# Altium PCB arm_board_n.PcbDoc (part 1 of 3)
Units mm, origin at the board's own origin, x right, y up, seen from the top; angles counter-clockwise.
Board outline 101.22 x 59.56 mm, 4 copper layers (Top Layer, Int1 (GND), Int2 (PWR), Bottom Layer), stack 1.565 mm thick; 88 components, 104 nets, 470 pads, 175 vias.
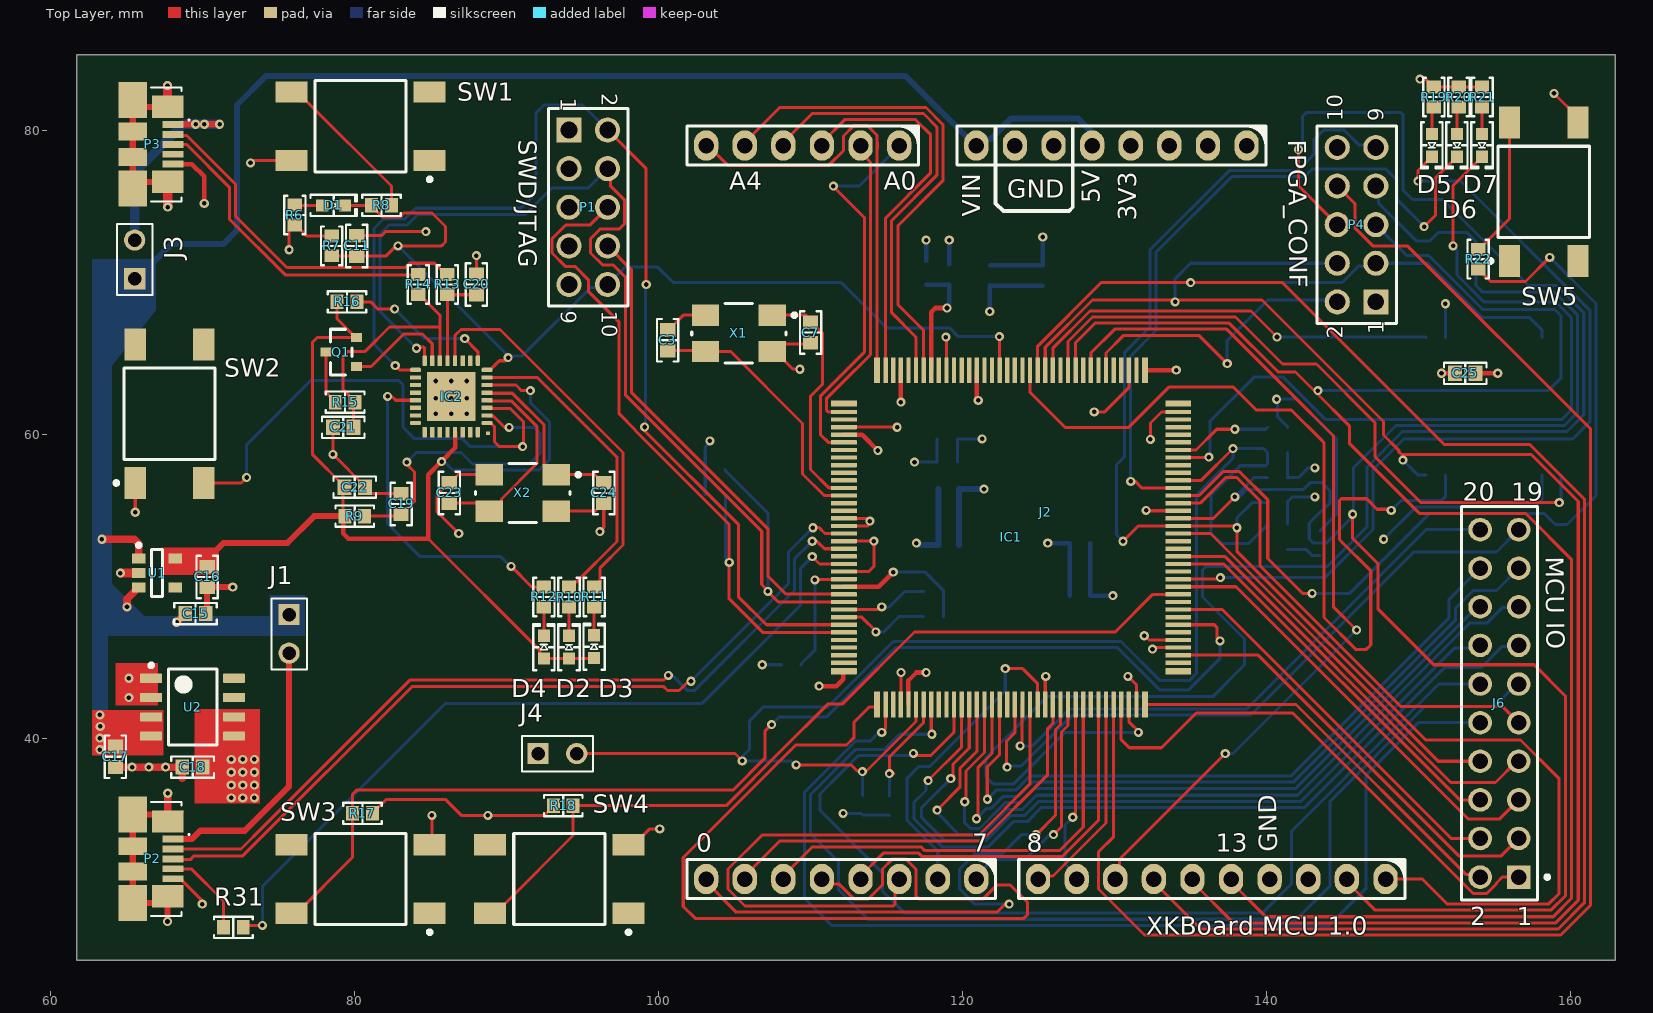
[diagram p0: Top Layer view]
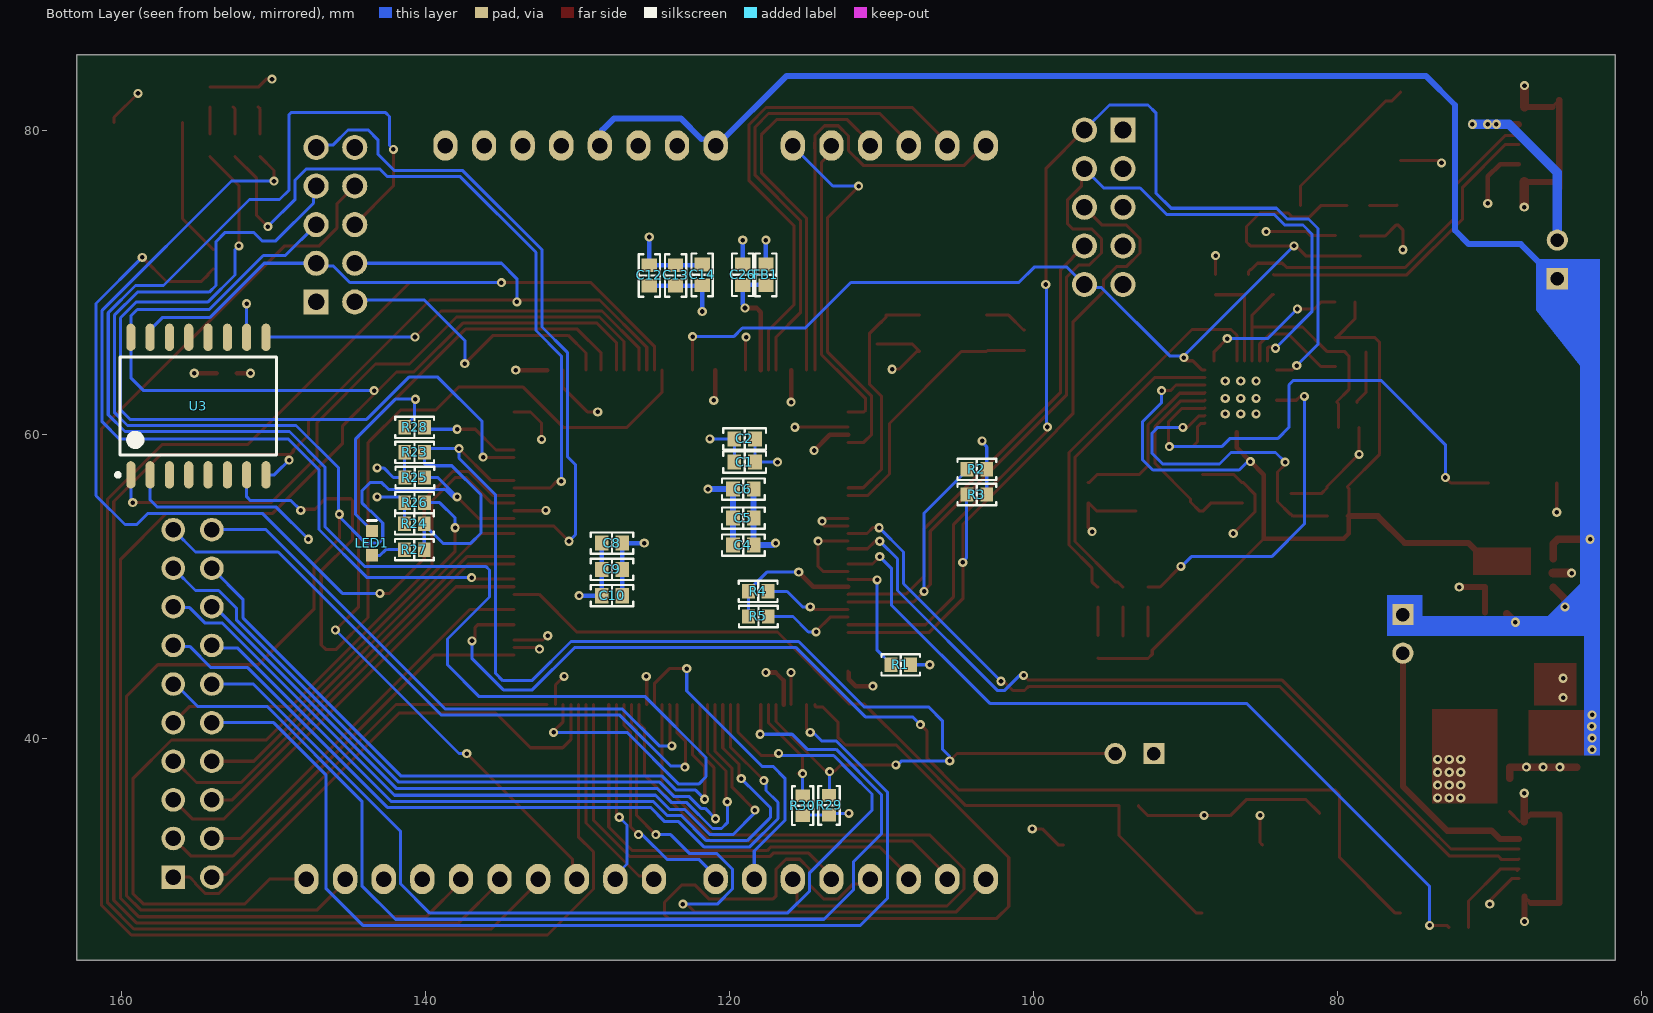
[diagram p1: Bottom Layer view, seen from below]
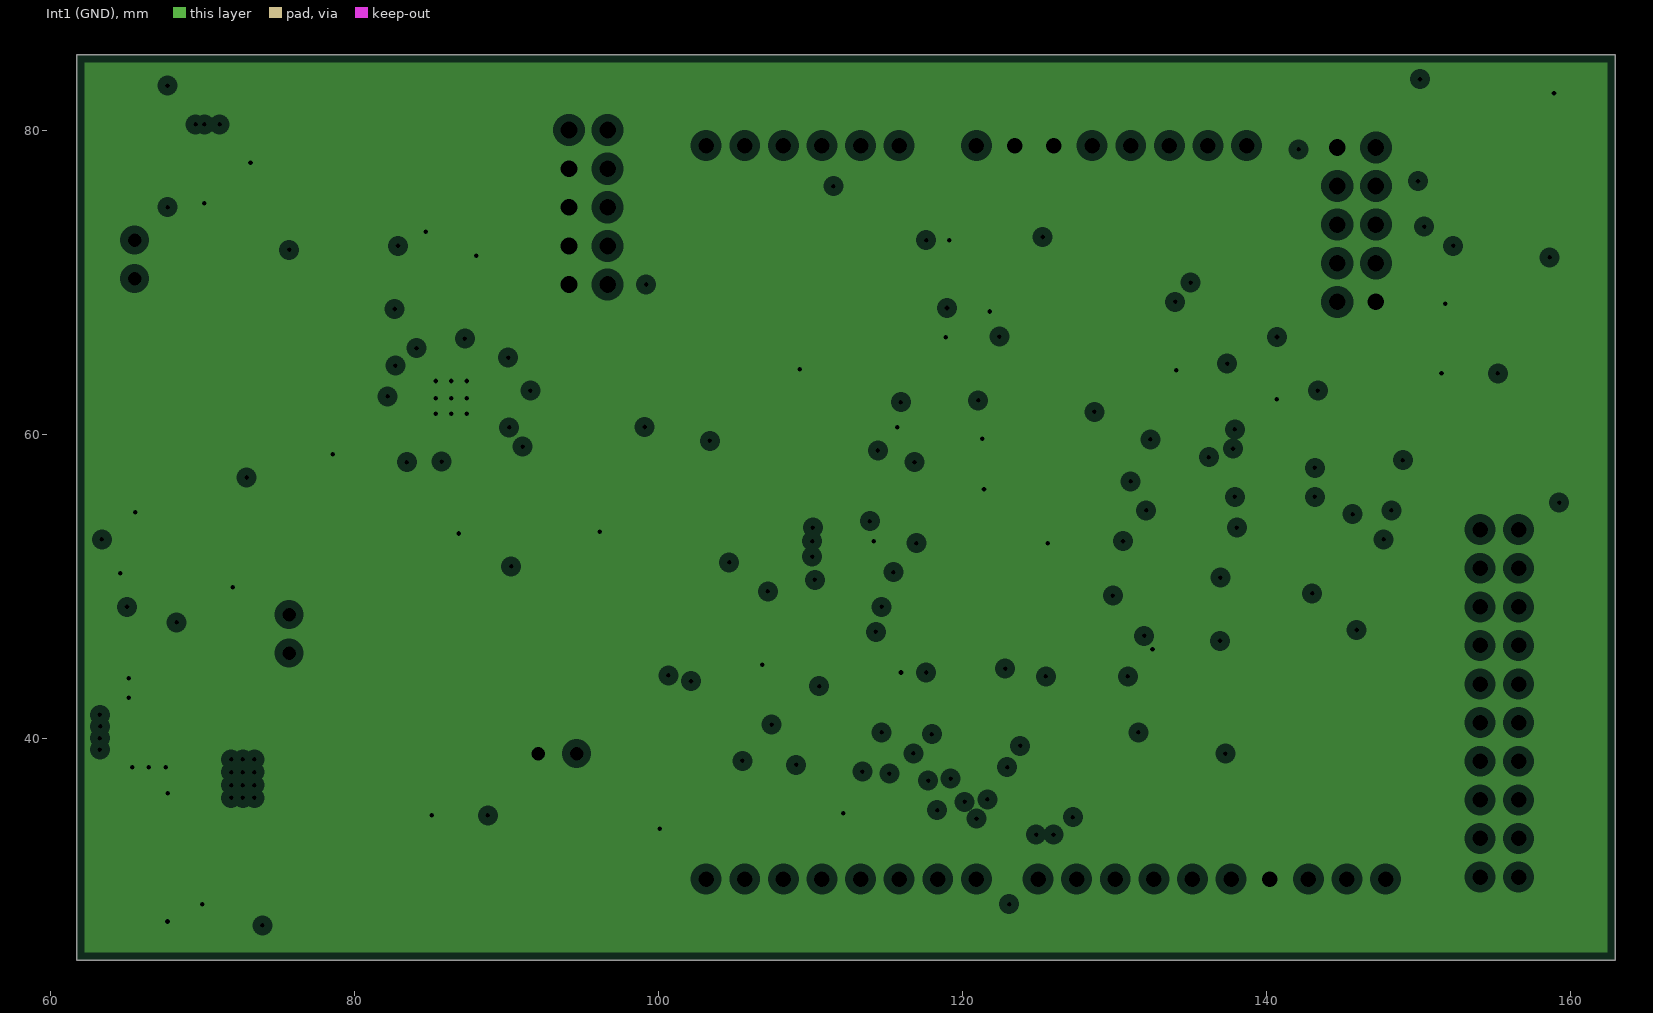
[diagram p2: Int1 (GND), clearances drawn from the general rule]
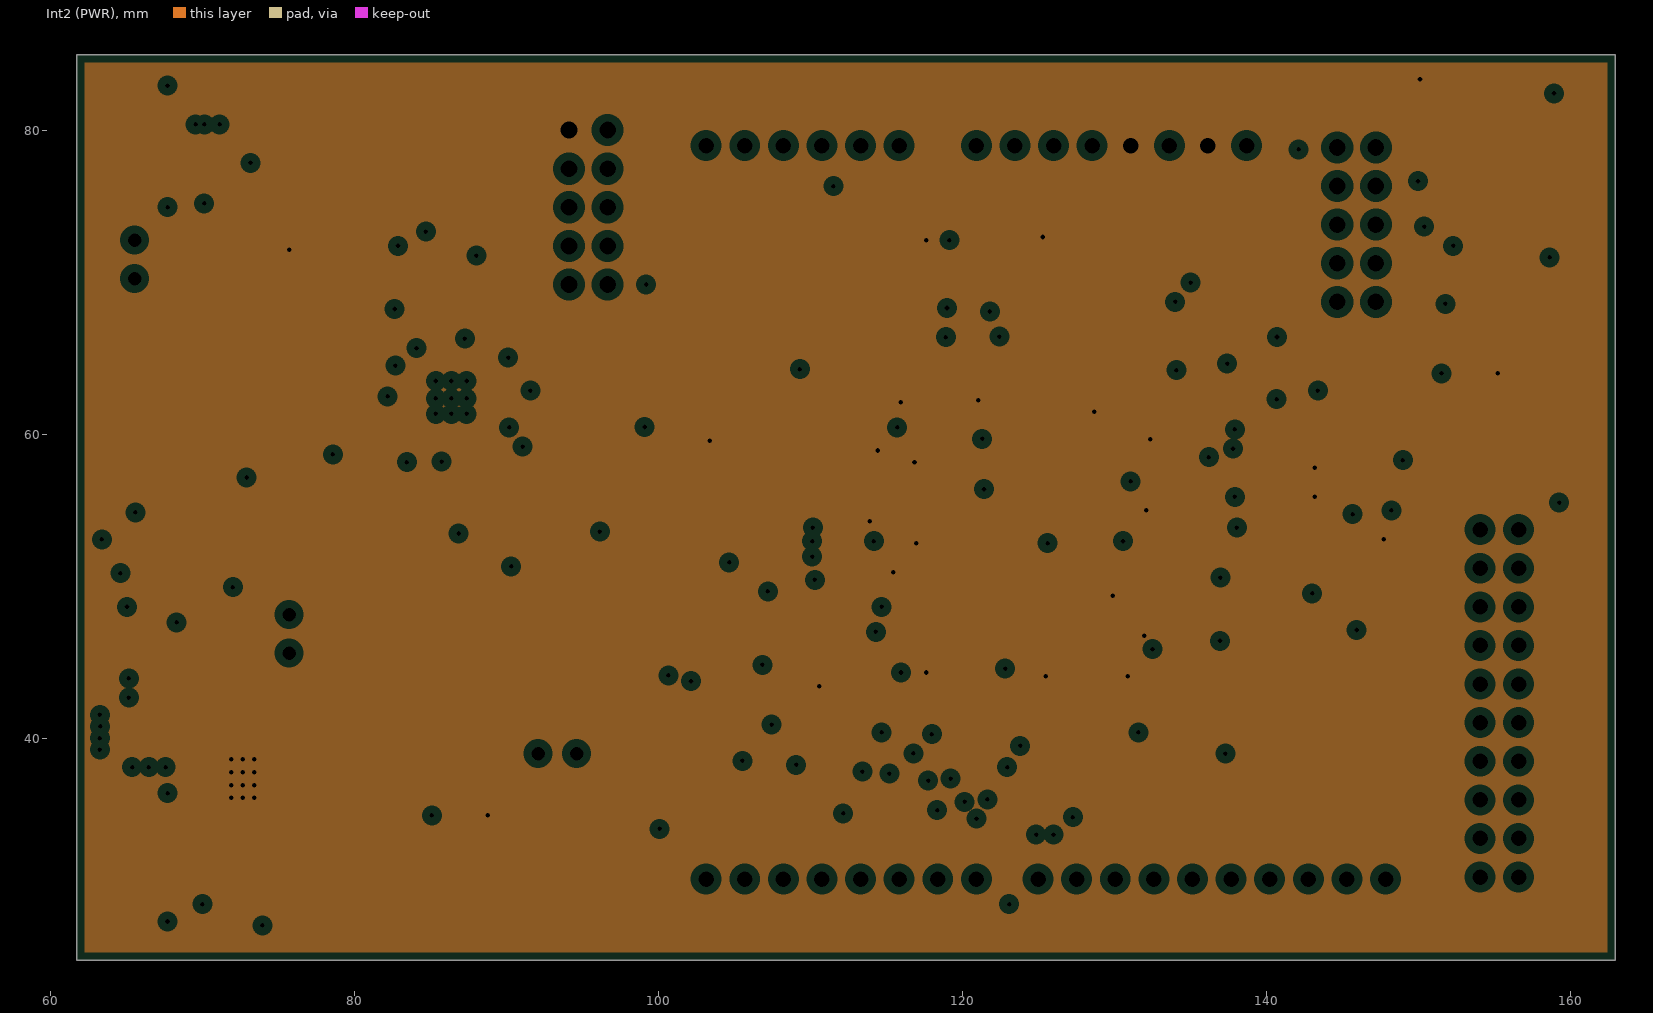
[diagram p3: Int2 (PWR), clearances drawn from the general rule]

## Layer stack, top to bottom
Top Solder: solder mask 0.0254, SM-001, Dk 4
Top Layer: signal copper 0.018
Dielectric 2: prepreg 0.1295, PP-017, Dk 4.3
Int1 (GND): plane copper 0.035, net GND
Dielectric 3: core 1.2, Core-039, Dk 4.8
Int2 (PWR): plane copper 0.035, net 3V3_MCU
Dielectric 4: prepreg 0.1295, PP-017, Dk 4.3
Bottom Layer: signal copper 0.018
Bottom Solder: solder mask 0.0254, SM-001, Dk 4

## Board outline
61.722,25.4 162.941,25.4 162.941,84.963 61.722,84.963

## Design rules (kind name [scope] priority, off if disabled: settings)
Clearance [All] p1: gap=0.2 ignorepadtopadclearanceinfootprint=FALSE
PlaneClearance [All] p1: clearance=0.508
PlaneConnect [All] p1: planeconnectstyle=Relief reliefexpansion=0.508 reliefentries=4 reliefconductorwidth=0.254 reliefairgap=0.254
PolygonConnect [All] p1: connectstyle=Relief reliefconductorwidth=0.254 reliefentries=4 polygonreliefangle="90 Angle" airgapwidth=0.254
RoutingVias [All] p1: holewidth=0.3 width=0.6 viastyle="Through Hole" minholewidth=0.3 minwidth=0.6 maxholewidth=0.3 maxwidth=0.6
SolderMaskExpansion [All] p1: expansion=0.102 istentingtop=FALSE
Width [All] p1: maxlimit=10 minlimit=0.2 preferedwidth=0.2 minimp=50.000000 maximp=50.000000 favimp=50.000000
28 further rules are at their usual default settings.

## Classes and differential pairs
net class A[10..20]: A10 A11 A12 A13 A14 A15 A16 A17 A18 A19 A20
component class POWER: C15 C16 C17 C18 U1 U2
component class PERIPHERALS: C25 D5 D6 D7 R17 R18 R19 R20 R21 SW3 SW4 U3
component class MCU_IO: C26 FB1 IC1 J4 LED1 R22 R23 R24 R25 R26 R27 R28 R29 R30 SW5
component class MCU_CORE: C1 C2 C3 C4 C5 C6 C7 C8 C9 C10 C11 C12 C13 C14 D1 J1 P1 P2 R1 R2 R3 R4 R5 R6 R7 R8 R31 SW1 X1
component class HEADERS: J2 J6 P4
component class DEBUG: C19 C20 C21 C22 C23 C24 D2 D3 D4 IC2 J3 P3 Q1 R9 R10 R11 R12 R13 R14 R15 R16 SW2 X2

## Components (designator, comment, footprint, x,y, rotation, side; value= is the part's Value field where it differs from the comment)
C1 "10µF" "CAP 0603_1608" 118.999,58.166 r180 bottom
C2 "4.7µF" "CAP 0603_1608" 118.999,59.69 r180 bottom
C3 "18pF" "CAP 0603_1608" 100.6,66.182 r270 top
C4 "4.7µF" "CAP 0603_1608" 119.086,52.705 r180 bottom
C5 "0.1µF" "CAP 0603_1608" 119.086,54.483 r180 bottom
C6 "0.01µF" "CAP 0603_1608" 119.086,56.388 r180 bottom
C7 "18pF" "CAP 0603_1608" 109.998,66.69 r90 top
C8 "0.01µF" "CAP 0603_1608" 127.722,52.832 r0 bottom
C9 "0.1µF" "CAP 0603_1608" 127.722,51.105 r0 bottom
C10 "4.7µF" "CAP 0603_1608" 127.722,49.378 r0 bottom
C11 "0.1µF" "CAP 0603_1608" 80.137,72.39 r90 top
C12 "0.1µF" "CAP 0603_1608" 125.273,70.445 r90 bottom
C13 "0.01µF" "CAP 0603_1608" 123.546,70.445 r90 bottom
C14 "0.1µF" "CAP 0603_1608" 121.793,70.485 r90 bottom
C15 "1µF" "CAP 0603_1608" 69.539,48.199 r180 top
C16 "10µF" "CAP 0603_1608" 70.301,50.612 r90 top
C17 "0.1µF" "CAP 0603_1608" 64.262,38.775 r90 top
C18 "10µF" "CAP 0603_1608" 69.342,38.1 r0 top
C19 "0.1µF" "CAP 0603_1608" 83.058,55.412 r270 top
C20 "18pF" "CAP 0603_1608" 88.011,69.85 r270 top
C21 "18pF" "CAP 0603_1608" 79.248,60.452 r0 top
C22 "0.1µF" "CAP 0603_1608" 80.01,56.515 r180 top
C23 "18pF" "CAP 0603_1608" 86.233,56.134 r270 top
C24 "18pF" "CAP 0603_1608" 96.393,56.134 r90 top
C25 "0.1µF" "CAP 0603_1608" 153.075,64.008 r0 top
C26 "0.1µF" "CAP 0603_1608" 119.126,70.496 r270 bottom
D1 "Blue" "LED 0603_1608 BLUE" 78.625,75.057 r0 top
D2 "Blue" "LED 0603_1608 BLUE" 94.107,45.986 r90 top
D3 "Blue" "LED 0603_1608 BLUE" 95.758,46.019 r90 top
D4 "Blue" "LED 0603_1608 BLUE" 92.456,45.989 r90 top
D5 "Blue" "LED 0603_1608 BLUE" 150.876,79.009 r270 top
D6 "Blue" "LED 0603_1608 BLUE" 152.527,79.009 r270 top
D7 "Blue" "LED 0603_1608 BLUE" 154.178,79.009 r270 top
FB1 "600 Ohms @ 100MHz" "FER 0603_1608" 117.602,70.485 r270 bottom
IC1 "LQFP144 - SOT486-1    LQFP144: plastic low profile quad flat package; 144 leads; body 20 x 20 x 1.4 mm    body + leads 22 x 22 mm   Solderland (pads) 0.4 x 1.5 mm on corners (8 x) and 0.28 x 1.5 mm (136 x)" LQFP144 123.19,53.213 r270 top
IC2 "CMSIS-DAP Interface : 32-bit LPC11U00 ARM Cortex M3 RISC 64KB Flash 2.5V/3.3V 33-Pin HVQFN EP" HVQFN33 86.36,62.484 r180 top
J1 "103185-2" TE_103185-2 75.692,46.863 r270 top
J2 "920-0088-01" "SCHMARTBOARD - 920-0088-01" 125.478,54.864 r270 top locked
J3 "103185-2" TE_103185-2 65.532,71.501 r90 top
J4 "103185-2" TE_103185-2 93.345,38.989 r0 top
J6 "MCU_IO_A" SLIN-PPPC102LFBN-RC_V 155.321,42.291 r90 top
LED1 "150060RS75000" 0603_A 143.51,52.832 r270 bottom
P1 "61301021121" 61301021121 95.377,74.93 r270 top
P2 "47346-0001" MOLEX_47346-0001 65.405,32.056 r270 top
P3 "47346-0001" MOLEX_47346-0001 65.405,79.069 r270 top
P4 "61301021121" 61301021121 145.923,73.787 r90 top
Q1 "BSS84" FP-SOT23-MFG 79.121,65.405 r180 top
R1 "12.1 kOhms" "RES 0603_1608" 108.727,44.831 r180 bottom
R2 "10 k" "RES 0603_1608" 103.722,57.683 r180 bottom
R3 "10 k" "RES 0603_1608" 103.722,56.032 r180 bottom
R4 "12.1 kOhms" "RES 0603_1608" 118.11,49.657 r0 bottom
R5 "12.1 kOhms" "RES 0603_1608" 118.095,48.006 r0 bottom
R6 "10 Ohms" "RES 0603_1608" 76.073,74.422 r270 top
R7 "100 k" "RES 0603_1608" 78.486,72.39 r270 top
R8 "100 Ohms" "RES 0603_1608" 81.773,75.057 r180 top
R9 "10 k" "RES 0603_1608" 80.01,54.61 r180 top
R10 "470 Ohms" "RES 0603_1608" 94.107,49.288 r270 top
R11 "470 Ohms" "RES 0603_1608" 95.758,49.291 r270 top
R12 "470 Ohms" "RES 0603_1608" 92.456,49.291 r270 top
R13 "33R" "RES 0603_1608" 86.106,69.85 r270 top
R14 "33R" "RES 0603_1608" 84.201,69.85 r270 top
R15 "1.5 k" "RES 0603_1608" 79.375,62.103 r0 top
R16 "10 k" "RES 0603_1608" 79.502,68.707 r0 top
R17 "10K Ohms" "RES 0603_1608" 80.518,35.052 r0 top
R18 "10K Ohms" "RES 0603_1608" 93.726,35.56 r180 top
R19 "470 Ohms" "RES 0603_1608" 151.003,82.184 r270 top
R20 "470 Ohms" "RES 0603_1608" 152.654,82.184 r270 top
R21 "470 Ohms" "RES 0603_1608" 154.178,82.184 r270 top
R22 "100 Ohms" "RES 0603_1608" 153.924,71.516 r90 top
R23 "2.2 k" "RES 0603_1608" 140.716,58.801 r0 bottom
R24 "2.2 k" "RES 0603_1608" 140.731,54.102 r0 bottom
R25 "2.2 k" "RES 0603_1608" 140.701,57.15 r0 bottom
R26 "2.2 k" "RES 0603_1608" 140.716,55.499 r0 bottom
R27 "2.2 k" "RES 0603_1608" 140.731,52.4 r180 bottom
R28 "2.2 k" "RES 0603_1608" 140.716,60.452 r180 bottom
R29 "2.2 k" "RES 0603_1608" 113.448,35.582 r90 bottom
R30 "2.2 k" "RES 0603_1608" 115.189,35.56 r90 bottom
R31 "Value" "RES 0603_1608" 72.024,27.559 r0 top
SW1 "FSM4JSMATR -  RESET" TECO-FSM4JSMATR_V 80.391,80.264 r270 top
SW2 "FSM4JSMATR" TECO-FSM4JSMATR_V 67.818,61.341 r180 top
SW3 "FSM4JSMATR" TECO-FSM4JSMATR_V 80.391,30.734 r270 top
SW4 "FSM4JSMATR" TECO-FSM4JSMATR_V 93.472,30.734 r270 top
SW5 "FSM4JSMATR" TECO-FSM4JSMATR_V 158.242,75.946 r180 top
U1 "TC1017-3.3VCTTR" SOT-23-CT5_L 66.999,50.866 r0 top
U2 "TPS77733DR" D0008A_N 69.342,42.037 r0 top
U3 "S25FL128SAGMFI011" SPSN-SOIC-16_L 154.94,61.849 r90 bottom
X1 "25MHZ" ABRA-ABMM2-4_V 105.284,66.635 r180 top
X2 "12MHz" ABRA-ABMM2-4_V 91.059,56.134 r180 top

## Footprints (in the part's own frame and the unit in brackets; to place one, negate y for a bottom-side part, rotate by r counter-clockwise, add the part's x,y. Pads: shape width x height; smd on the part's side, far side on the other; paste and mask are expansions set on the pad)
0603_A [mm] "Chip LED, 2-Leads, Body 1.6x0.8mm, IPC Medium Density"
  rect 0.8x0.8 smd: 1(-0.8,0) 2(0.8,0)
  silkscreen extent -1.5,-0.3 -1.5,0.3, body extent -0.8,-0.4 0.8,0.4, height 0.7
61301021121 [mm] "Pin Header, pitch 2.54 mm, THT, Vertical, dual row, 10p"
  rect 1.65x1.65 hole 1.1: 1(-5.08,-1.27)
  round 1.65 hole 1.1: 2(-5.08,1.27) 3(-2.54,-1.27) 4(-2.54,1.27) 5(0,-1.27) 6(0,1.27) 7(2.54,-1.27) 8(2.54,1.27) 9(5.08,-1.27) 10(5.08,1.27)
  silkscreen extent -6.5,-2.62 6.5,2.62, body extent -6.35,-2.54 6.35,2.54, height 8.59
ABRA-ABMM2-4_V [mm] "SMD, 4-Leads, Body 6.2x3.9mm, Pitch 4.4mm, Height 1.2mm"
  rect 1.8x1.4 smd: 1(-2.2,-1.2) 2(2.2,-1.2) 3(2.2,1.2) 4(-2.2,1.2)
  silkscreen extent -3.78,-1.95 3.1,1.95, body extent -3.1,-1.95 3.1,1.95, height 1.2
"CAP 0603_1608" [mm] "Chip Capacitor, 2-Leads, Body 1.60x0.80mm, IPC Medium Density"
  rect 0.9x1 smd: 1(-0.675,0) 2(0.675,0)
  silkscreen extent -1.4,-0.7 1.4,0.7, body extent -0.8,-0.41 0.8,0.41, height 0.82
D0008A_N [mm] "SOIC, 8-Leads, Body 5x4mm, Pitch 1.27mm, IPC Medium Density"
  rrect17% 1.45x0.6 smd: 1(-2.725,1.905) 2(-2.725,0.635) 3(-2.725,-0.635) 4(-2.725,-1.905) 5(2.725,-1.905) 6(2.725,-0.635) 7(2.725,0.635) 8(2.725,1.905)
  silkscreen extent -2.85,-2.5 1.6,2.88, body extent -3,-2.45 3,2.45, height 1.63
"FER 0603_1608" [mm] "Chip Ferrite, 2-Leads, Body 1.60x0.80mm, IPC Medium Density"
  rect 0.9x1 smd: 1(-0.675,0) 2(0.675,0)
  silkscreen extent -1.4,-0.7 1.4,0.7, body extent -0.8,-0.41 0.8,0.41, height 0.82
FP-SOT23-MFG [mm]
  rect 0.7x0.6 smd paste-1000 mask+0: 1(-1,0.95) 2(-1,-0.95) 3(1,0)
  silkscreen extent -0.7,-1.5 0.7,1.5, body extent -1.5,-1.65 1.5,1.65, height 0.25
HVQFN33 [mm]
  rrect50% 0.7x0.28 smd mask+0: 1(-2.35,1.75) 8(-2.35,-1.75) 17(2.35,-1.75) 24(2.35,1.75)
  rect 0.7x0.28 smd mask+0: 2(-2.35,1.25) 3(-2.35,0.75) 4(-2.35,0.25) 5(-2.35,-0.25) 6(-2.35,-0.75) 7(-2.35,-1.25) 18(2.35,-1.25) 19(2.35,-0.75) 20(2.35,-0.25) 21(2.35,0.25) 22(2.35,0.75) 23(2.35,1.25)
  rrect50% 0.28x0.7 smd mask+0: 9(-1.75,-2.35) 16(1.75,-2.35) 25(1.75,2.35) 32(-1.75,2.35)
  rect 0.28x0.7 smd mask+0: 10(-1.25,-2.35) 11(-0.75,-2.35) 12(-0.25,-2.35) 13(0.25,-2.35) 14(0.75,-2.35) 26(1.25,2.35) 27(0.75,2.35) 28(0.25,2.35) 29(-0.25,2.35) 30(-0.75,2.35) 31(-1.25,2.35)
  rect 0.28x0.7 smd paste+0 mask+0: 15(1.25,-2.35)
  rect 3.2x3.2 smd: EXP(0,0)
  rect 0.25x0.25 smd: M1(-2.415,2.415)
"LED 0603_1608 BLUE" [mm] "Chip Diode, 2-Leads, Body 1.60x0.80mm, IPC Medium Density"
  rect 0.8x0.8 smd: 1(-0.75,0) 2(0.75,0)
  silkscreen extent -1.52,-0.7 1.52,0.7, body extent -0.8,-0.4 0.8,0.4, height 0.53
LQFP144 [mm]
  rrect10% 0.4x1.7 smd: P1(-8.81,-11) P36(8.81,-11) P73(8.81,11) P108(-8.81,11)
  rrect10% 0.28x1.7 smd: P2(-8.25,-11) P3(-7.75,-11) P4(-7.25,-11) P5(-6.75,-11) P6(-6.25,-11) P7(-5.75,-11) P8(-5.25,-11) P9(-4.75,-11) P10(-4.25,-11) P11(-3.75,-11) P12(-3.25,-11) P13(-2.75,-11) P14(-2.25,-11) P15(-1.75,-11) P16(-1.25,-11) P17(-0.75,-11) P18(-0.25,-11) P19(0.25,-11) P20(0.75,-11) P21(1.25,-11) P22(1.75,-11) P23(2.25,-11) P24(2.75,-11) P25(3.25,-11) P26(3.75,-11) P27(4.25,-11) P28(4.75,-11) P29(5.25,-11) P30(5.75,-11) P31(6.25,-11) P32(6.75,-11) P33(7.25,-11) P34(7.75,-11) P35(8.25,-11) P74(8.25,11) P75(7.75,11) P76(7.25,11) P77(6.75,11) P78(6.25,11) P79(5.75,11) P80(5.25,11) P81(4.75,11) P82(4.25,11) P83(3.75,11) P84(3.25,11) P85(2.75,11) P86(2.25,11) P87(1.75,11) P88(1.25,11) P89(0.75,11) P90(0.25,11) P91(-0.25,11) P92(-0.75,11) P93(-1.25,11) P94(-1.75,11) P95(-2.25,11) P96(-2.75,11) P97(-3.25,11) P98(-3.75,11) P99(-4.25,11) P100(-4.75,11) P101(-5.25,11) P102(-5.75,11) P103(-6.25,11) P104(-6.75,11) P105(-7.25,11) P106(-7.75,11) P107(-8.25,11)
  rrect10% 1.7x0.4 smd: P37(11,-8.81) P72(11,8.81) P109(-11,8.81) P144(-11,-8.81)
  rrect10% 1.7x0.28 smd: P38(11,-8.25) P39(11,-7.75) P40(11,-7.25) P41(11,-6.75) P42(11,-6.25) P43(11,-5.75) P44(11,-5.25) P45(11,-4.75) P46(11,-4.25) P47(11,-3.75) P48(11,-3.25) P49(11,-2.75) P50(11,-2.25) P51(11,-1.75) P52(11,-1.25) P53(11,-0.75) P54(11,-0.25) P55(11,0.25) P56(11,0.75) P57(11,1.25) P58(11,1.75) P59(11,2.25) P60(11,2.75) P61(11,3.25) P62(11,3.75) P63(11,4.25) P64(11,4.75) P65(11,5.25) P66(11,5.75) P67(11,6.25) P68(11,6.75) P69(11,7.25) P70(11,7.75) P71(11,8.25) P110(-11,8.25) P111(-11,7.75) P112(-11,7.25) P113(-11,6.75) P114(-11,6.25) P115(-11,5.75) P116(-11,5.25) P117(-11,4.75) P118(-11,4.25) P119(-11,3.75) P120(-11,3.25) P121(-11,2.75) P122(-11,2.25) P123(-11,1.75) P124(-11,1.25) P125(-11,0.75) P126(-11,0.25) P127(-11,-0.25) P128(-11,-0.75) P129(-11,-1.25) P130(-11,-1.75) P131(-11,-2.25) P132(-11,-2.75) P133(-11,-3.25) P134(-11,-3.75) P135(-11,-4.25) P136(-11,-4.75) P137(-11,-5.25) P138(-11,-5.75) P139(-11,-6.25) P140(-11,-6.75) P141(-11,-7.25) P142(-11,-7.75) P143(-11,-8.25)
MOLEX_47346-0001 [mm]
  rect 0.45x1.38 smd: 1(-1.3,2.66) 2(-0.65,2.66) 3(0,2.66) 4(0.65,2.66) 5(1.3,2.66)
  rect 1.475x2.1 smd: SH1(-2.462,2.3) SH2(2.462,2.3)
  rect 2.375x1.9 smd: SH3(-2.913,0) SH6(2.913,0)
  rect 1.175x1.9 smd: SH4(-0.837,0) SH5(0.837,0)
  silkscreen extent -3.75,1.2 3.75,3.75, body extent -4.18,-2.93 4.18,2.5, height 2.7
"RES 0603_1608" [mm] "Chip Resistor, 2-Leads, Body 1.60x0.80mm, IPC Medium Density"
  rect 0.85x0.95 smd: 1(-0.65,0) 2(0.65,0)
  silkscreen extent -1.27,-0.7 1.27,0.7, body extent -0.8,-0.4 0.8,0.4, height 0.45
"SCHMARTBOARD - 920-0088-01" [mm] "Arduino pin header set"
  oval 2x1.6 hole 1.02: 1(-24.13,13.21) 2(-24.13,10.67) 3(-24.13,8.13) 4(-24.13,5.59) 5(-24.13,3.05) 6(-24.13,0.51) 7(-24.13,-2.03) 8(-24.13,-4.57) 9(-24.13,-9.65) 10(-24.13,-12.19) 11(-24.13,-14.73) 12(-24.13,-17.27) 13(-24.13,-19.81) 14(-24.13,-22.35) 15(24.13,-22.35) 16(24.13,-19.81) 17(24.13,-17.27) 18(24.13,-14.73) 19(24.13,-12.19) 20(24.13,-9.65) 21(24.13,-7.11) 22(24.13,-4.57) 23(24.13,-0.51) 24(24.13,2.03) 25(24.13,4.57) 26(24.13,7.11) 27(24.13,9.65) 28(24.13,12.19) 29(24.13,14.73) 30(24.13,17.27) 31(24.13,19.81) 32(24.13,22.35)
  silkscreen extent -25.4,-23.62 25.4,23.62, body extent -25.4,-23.62 25.4,23.62, height 8.5
SLIN-PPPC102LFBN-RC_V [mm] "THD, 20-Leads, Body 25.9x5mm, Pitch 2.54mm"
  rect 1.55x1.55 hole 1.02: 1(-11.43,-1.27)
  round 1.55 hole 1.02: 2(-11.43,1.27) 3(-8.89,-1.27) 4(-8.89,1.27) 5(-6.35,-1.27) 6(-6.35,1.27) 7(-3.81,-1.27) 8(-3.81,1.27) 9(-1.27,-1.27) 10(-1.27,1.27) 11(1.27,-1.27) 12(1.27,1.27) 13(3.81,-1.27) 14(3.81,1.27) 15(6.35,-1.27) 16(6.35,1.27) 17(8.89,-1.27) 18(8.89,1.27) 19(11.43,-1.27) 20(11.43,1.27)
  silkscreen extent -12.95,-3.27 12.95,2.5, body extent -12.95,-2.5 12.95,2.5, height 8.75
SOT-23-CT5_L [mm] "SOT23, 5-Leads, Body 2.9x1.7mm, Pitch 0.95mm, Lead Span 2.8mm, IPC High Density"
  rect 0.9x0.65 smd: 1(-1.2,0.95) 2(-1.2,0) 3(-1.2,-0.95) 4(1.2,-0.95) 5(1.2,0.95)
  silkscreen extent -1.32,-1.55 0.35,1.95, body extent -0.9,-1.55 0.9,1.55, height 1.45
SPSN-SOIC-16_L [mm] "SOIC, 16-Leads, Body 10.3x7.5mm, Pitch 1.27mm, IPC High Density"
  oval 1.8x0.6 smd: 1(-4.525,4.445) 2(-4.525,3.175) 3(-4.525,1.905) 4(-4.525,0.635) 5(-4.525,-0.635) 6(-4.525,-1.905) 7(-4.525,-3.175) 8(-4.525,-4.445) 9(4.525,-4.445) 10(4.525,-3.175) 11(4.525,-1.905) 12(4.525,-0.635) 13(4.525,0.635) 14(4.525,1.905) 15(4.525,3.175) 16(4.525,4.445)
  silkscreen extent -4.65,-5.15 3.22,5.42, body extent -3.75,-5.15 3.75,5.15, height 2.65
TE_103185-2 [mm]
  rect 1.398x1.398 hole 0.89: 1(-1.27,0)
  round 1.398 hole 0.89: 2(1.27,0)
  silkscreen extent -2.34,-1.17 2.34,1.17
TECO-FSM4JSMATR_V [mm] "SMD, 4-Leads, Body 6x6mm, Pitch 4.5mm"
  rect 1.4x2.1 smd: 1(2.25,4.55) 2(2.25,-4.55) 3(-2.25,4.55) 4(-2.25,-4.55)
  silkscreen extent -3,-3 3.62,4.68, body extent -3,-5 3,5, height 5.08

## Part data
C1: library part GRM188R61A106MAALD, "CAP CER 10UF 10V X5R 0603", Device Package="0603 (1608 Metric)", Manufacturer="Murata Electronics", Operating Temperature="-55°C ~ 85°C", Supplier Part Number 1=490-12734-1-ND, Temperature Coefficient=X5R, Tolerance=±20%, Voltage - Rated=10V, Applications="General Purpose", Capacitance=10µF, ComponentLink1Description=Datasheet, ComponentLink1URL=https://search.murata.co.jp/Ceramy/image/img/A01X/G101/ENG/GRM188R61A106MAAL-01.pdf, ComponentLink2Description="DigiKey Link", ComponentLink2URL=http://digikey.com/product-detail/en/murata-electronics/GRM188R61A106MAALD/490-12734-1-ND/5797703, LastUpdated="02.09.2020 1:03:35", Lifecycle Status=Active, Minimum Order=1, Mounting Type="Surface Mount, MLCC", Package / Case="0603 (1608 Metric)", Packaging=TapeAndReel, Part Number=GRM188R61A106MAALD, Part Status=Active, PartId=2423, Price=0.08, Series=GRM, Size / Dimension="0.063\" L x 0.031\" W (1.60mm x 0.80mm)", Supplier 1=DigiKey, Thickness (Max)="0.037\" (0.95mm)"
C2 C4 C10: library part LMK107BJ475KA-T, "CAP CER 4.7UF 10V X5R 0603", Device Package="0603 (1608 Metric)", Manufacturer="Taiyo Yuden", Operating Temperature="-55°C ~ 85°C", Supplier Part Number 1=587-1441-1-ND, Temperature Coefficient=X5R, Tolerance=±10%, Voltage - Rated=10V, Applications="General Purpose", Capacitance=4.7µF, ComponentLink1Description=Datasheet, ComponentLink1URL="https://ds.yuden.co.jp/TYCOMPAS/ut/detail?pn=LMK107BJ475KA-T  &u=M", ComponentLink2Description="DigiKey Link", ComponentLink2URL=http://digikey.com/product-detail/en/taiyo-yuden/LMK107BJ475KA-T/587-1441-1-ND/1004072, LastUpdated="02.09.2020 1:03:36", Lifecycle Status=Active, Minimum Order=1, Mounting Type="Surface Mount, MLCC", Package / Case="0603 (1608 Metric)", Packaging=TapeAndReel, Part Number=LMK107BJ475KA-T, Part Status=Active, PartId=2244, Price=0.03, Series=M, Size / Dimension="0.063\" L x 0.031\" W (1.60mm x 0.80mm)", Supplier 1=DigiKey, Thickness (Max)="0.035\" (0.90mm)"
C3 C7 C20 C21 C23 C24: library part VJ0603A180FXQCW1BC, "CAP CER 18PF 10V C0G/NP0 0603", Device Package="0603 (1608 Metric)", Manufacturer="Vishay Vitramon", Operating Temperature="-55°C ~ 125°C", Supplier Part Number 1=720-1660-1-ND, Temperature Coefficient="C0G, NP0", Tolerance=±1%, Voltage - Rated=10V, Applications="General Purpose", Capacitance=18pF, ComponentLink1Description=Datasheet, ComponentLink1URL=https://www.vishay.com/docs/28548/vjw1bcbascomseries.pdf, ComponentLink2Description="DigiKey Link", ComponentLink2URL=http://digikey.com/product-detail/en/vishay-vitramon/VJ0603A180FXQCW1BC/720-1660-1-ND/8324080, LastUpdated="02.09.2020 1:03:27", Lifecycle Status=Active, Minimum Order=1, Mounting Type="Surface Mount, MLCC", Package / Case="0603 (1608 Metric)", Packaging=TapeAndReel, Part Number=VJ0603A180FXQCW1BC, Part Status=Active, PartId=7094, Price=0.04, Series=VJ, Size / Dimension="0.063\" L x 0.031\" W (1.60mm x 0.80mm)", Supplier 1=DigiKey, Thickness (Max)="0.034\" (0.87mm)"
C5 C9 C12 C14 C25 C26: library part C0603C104K5RAC7411, "CAP CER 0.1UF 50V X7R 0603", Device Package="0603 (1608 Metric)", Manufacturer=KEMET, Operating Temperature="-55°C ~ 125°C", Supplier Part Number 1=399-7374-2-ND, Temperature Coefficient=X7R, Tolerance=±10%, Voltage - Rated=50V, Applications="Bypass, Decoupling", Capacitance=0.1µF, ComponentLink1Description=Datasheet, ComponentLink1URL=https://api.kemet.com/component-edge/download/datasheet/C0603C104K5RAC7411.pdf, ComponentLink2Description="DigiKey Link", ComponentLink2URL=http://digikey.com/product-detail/en/kemet/C0603C104K5RAC7411/399-7374-2-ND/3317013, LastUpdated="02.09.2020 1:03:36", Lifecycle Status=Active, Minimum Order=15000, Mounting Type="Surface Mount, MLCC", Package / Case="0603 (1608 Metric)", Packaging=TapeAndReel, Part Number=C0603C104K5RAC7411, Part Status=Active, PartId=2233, Price=0.02, Series="SMD Comm X7R", Size / Dimension="0.063\" L x 0.031\" W (1.60mm x 0.80mm)", Supplier 1=DigiKey, Thickness (Max)="0.035\" (0.90mm)"
C6 C8 C13: library part C0603C103KARACAUTO, "CAP CER 0.01UF 250V X7R 0603", Device Package="0603 (1608 Metric)", Manufacturer=KEMET, Operating Temperature="-55°C ~ 125°C", Ratings=AEC-Q200, Supplier Part Number 1=399-17960-1-ND, Temperature Coefficient=X7R, Tolerance=±10%, Voltage - Rated=250V, Applications="Automotive, Bypass, Decoupling", Capacitance=0.01µF, ComponentLink1Description=Datasheet, ComponentLink1URL=https://api.kemet.com/component-edge/download/datasheet/C0603C103KARACAUTO.pdf, ComponentLink2Description="DigiKey Link", ComponentLink2URL=http://digikey.com/product-detail/en/kemet/C0603C103KARACAUTO/399-17960-1-ND/9084030, LastUpdated="02.09.2020 1:03:10", Lifecycle Status=Active, Minimum Order=1, Mounting Type="Surface Mount, MLCC", Package / Case="0603 (1608 Metric)", Packaging=TapeAndReel, Part Number=C0603C103KARACAUTO, Part Status=Active, PartId=15195, Price=0.25, Series="SMD Auto X7R", Size / Dimension="0.063\" L x 0.031\" W (1.60mm x 0.80mm)", Supplier 1=DigiKey, Thickness (Max)="0.034\" (0.87mm)"
C11 C19 C22: library part C0603T104K8RAC7867, "CAP CER 0.1UF 10V X7R 0603", Device Package="0603 (1608 Metric)", Manufacturer=KEMET, Operating Temperature="-55°C ~ 125°C", Ratings=COTS, Supplier Part Number 1=399-20424-1-ND, Temperature Coefficient=X7R, Tolerance=±10%, Voltage - Rated=10V, Applications="High Reliability, Bypass, Decoupling", Capacitance=0.1µF, ComponentLink1Description=Datasheet, ComponentLink1URL=https://api.kemet.com/component-edge/download/datasheet/C0603T104K8RAC7867.pdf, ComponentLink2Description="DigiKey Link", ComponentLink2URL=http://digikey.com/product-detail/en/kemet/C0603T104K8RAC7867/399-20424-1-ND/9925028, LastUpdated="02.09.2020 1:03:35", Lifecycle Status=Active, Minimum Order=1, Mounting Type="Surface Mount, MLCC", Package / Case="0603 (1608 Metric)", Packaging=TapeAndReel, Part Number=C0603T104K8RAC7867, Part Status=Active, PartId=2528, Price=0.23, Series="SMD COTS X7R", Size / Dimension="0.063\" L x 0.031\" W (1.60mm x 0.80mm)", Supplier 1=DigiKey, Thickness (Max)="0.034\" (0.87mm)"
C15: library part C0603X105M4RACAUTO, "CAP CER 0603 1UF 16V X7R 20%", Device Package="0603 (1608 Metric)", Manufacturer=KEMET, Operating Temperature="-55°C ~ 125°C", Ratings=AEC-Q200, Supplier Part Number 1=399-17719-1-ND, Temperature Coefficient=X7R, Tolerance=±20%, Voltage - Rated=16V, Applications="Automotive, Boardflex Sensitive", Capacitance=1µF, ComponentLink1Description=Datasheet, ComponentLink1URL=https://api.kemet.com/component-edge/download/datasheet/C0603X105M4RACAUTO.pdf, ComponentLink2Description="DigiKey Link", ComponentLink2URL=http://digikey.com/product-detail/en/kemet/C0603X105M4RACAUTO/399-17719-1-ND/8635870, Features="Soft Termination", LastUpdated="02.09.2020 1:03:33", Lifecycle Status=Active, Minimum Order=1, Mounting Type="Surface Mount, MLCC", Package / Case="0603 (1608 Metric)", Packaging=TapeAndReel, Part Number=C0603X105M4RACAUTO, Part Status=Active, PartId=3927, Price=0.07, Series="SMD Auto X7R Flex", Size / Dimension="0.063\" L x 0.031\" W (1.60mm x 0.80mm)", Supplier 1=DigiKey, Thickness (Max)="0.037\" (0.95mm)"
C16 C18: library part GRT188R61C106KE13D, "CAP CER 10UF 16V X5R 0603", Device Package="0603 (1608 Metric)", Manufacturer="Murata Electronics", Operating Temperature="-55°C ~ 85°C", Ratings=AEC-Q200, Supplier Part Number 1=490-12317-1-ND, Temperature Coefficient=X5R, Tolerance=±10%, Voltage - Rated=16V, Applications=Automotive, Capacitance=10µF, ComponentLink1Description=Datasheet, ComponentLink1URL=https://search.murata.co.jp/Ceramy/image/img/A01X/G101/ENG/GRT188R61C106KE13-01.pdf, ComponentLink2Description="DigiKey Link", ComponentLink2URL=http://digikey.com/product-detail/en/murata-electronics/GRT188R61C106KE13D/490-12317-1-ND/5417018, LastUpdated="02.09.2020 1:03:11", Lifecycle Status=Active, Minimum Order=1, Mounting Type="Surface Mount, MLCC", Package / Case="0603 (1608 Metric)", Packaging=TapeAndReel, Part Number=GRT188R61C106KE13D, Part Status=Active, PartId=14922, Price=0.10, Series=GRT, Size / Dimension="0.063\" L x 0.031\" W (1.60mm x 0.80mm)", Supplier 1=DigiKey, Thickness (Max)="0.035\" (0.90mm)"
C17: library part CS0603KRX7R7BB104, "CAP CER 0.1UF 16V X7R 0603", Device Package="0603 (1608 Metric)", Manufacturer=Yageo, Operating Temperature="-55°C ~ 125°C", Supplier Part Number 1=311-3560-1-ND, Temperature Coefficient=X7R, Tolerance=±10%, Voltage - Rated=16V, Applications="Boardflex Sensitive", Capacitance=0.1µF, ComponentLink1Description=Datasheet, ComponentLink1URL=http://www.yageo.com/NewPortal/yageodocoutput?fileName=/pdf/MLCC/UPY-ST_NPOX7R_16V-to-3KV_5.pdf, ComponentLink2Description="DigiKey Link", ComponentLink2URL=http://digikey.com/product-detail/en/yageo/CS0603KRX7R7BB104/311-3560-1-ND/7648487, Features="Soft Termination", LastUpdated="02.09.2020 1:03:36", Lifecycle Status=Active, Minimum Order=1, Mounting Type="Surface Mount, MLCC", Package / Case="0603 (1608 Metric)", Packaging=TapeAndReel, Part Number=CS0603KRX7R7BB104, Part Status=Active, PartId=2286, Price=0.02, Series=CS, Size / Dimension="0.063\" L x 0.031\" W (1.60mm x 0.80mm)", Supplier 1=DigiKey, Thickness (Max)="0.037\" (0.95mm)"
D1 D2 D3 D4 D5 D6 D7: library part VLMB1300-GS08, "LED BLUE 0603 SMD", Current - Test=20mA, Device Package="0603 (1608 Metric)", Lens Color=1.00mm, Manufacturer="Vishay Semiconductor Opto Division", Millicandela Rating=104mcd, Supplier Device Package=0603, Supplier Part Number 1=VLMB1300-GS08CT-ND, Voltage - Forward (Vf) (Typ)=3.3V, Color=Blue, ComponentLink1Description=Datasheet, ComponentLink1URL=http://www.vishay.com/docs/82437/vlmo1300.pdf, ComponentLink2Description="DigiKey Link", ComponentLink2URL=http://digikey.com/product-detail/en/vishay-semiconductor-opto-division/VLMB1300-GS08/VLMB1300-GS08CT-ND/3025485, Configuration=Standard, Height (Max)=1.00mm, LastUpdated="02.09.2020 1:20:26", Lens Size="1.10mm x 0.80mm", Lens Style="Rectangle with Flat Top", Lifecycle Status=Active, Minimum Order=1, Mounting Type="Surface Mount", Package / Case="0603 (1608 Metric)", Packaging=TapeAndReel, Part Number=VLMB1300-GS08, Part Status=Active, PartId=785, Price=0.08, Series=CHIPLED, Size / Dimension="1.60mm L x 0.80mm W", Supplier 1=DigiKey, Viewing Angle=130°, Wavelength - Dominant=470nm, Wavelength - Peak=468nm
FB1: library part BLM18AG601SN1D, "FERRITE BEAD 600 OHM 0603 1LN", Current Rating (Max)=500mA, DC Resistance (DCR) (Max)=380mOhm, Device Package="0603 (1608 Metric)", Manufacturer="Murata Electronics", Operating Temperature="-55°C ~ 125°C", Supplier Part Number 1=490-1014-1-ND, ComponentLink1Description=Datasheet, ComponentLink1URL=https://www.murata.com/en-us/products/productdata/8796738650142/ENFA0003.pdf, ComponentLink2Description="DigiKey Link", ComponentLink2URL=http://digikey.com/product-detail/en/murata-electronics/BLM18AG601SN1D/490-1014-1-ND/584462, Height (Max)="0.037\" (0.95mm)", Impedance @ Frequency="600 Ohms @ 100MHz", LastUpdated="02.09.2020 1:18:18", Lifecycle Status=Active, Minimum Order=1, Mounting Type="Surface Mount", Number of Lines=1, Package / Case="0603 (1608 Metric)", Packaging=TapeAndReel, Part Number=BLM18AG601SN1D, Part Status=Active, PartId=848, Price=0.02, Series="EMIFIL®, BLM18", Size / Dimension="0.063\" L x 0.032\" W (1.60mm x 0.80mm)", Supplier 1=DigiKey
IC1: library part LPC4300_LQFP144, Package=LQFP144, DeviceSetName=LPC4300_LQFP144, GateName_1=G$1, GateName_2=G$2, GateName_3=G$3, GateName_4=G$4, GateName_5=G$5, GateName_6=G$6, GateName_7=G$7, GateName_8=G$8, GateName_9=G$9, GateName_10=G$10, GateName_11=G$11, GateName_12=G$12, GateName_13=G$13, GateName_14=G$14, GateName_15=G$15, GateName_16=G$16, GateName_17=G$17, LibraryName=LPC4300, SymbolName_1=144_0_PORT0, SymbolName_2=144_1_PORT1, SymbolName_3=144_2_PORT2, SymbolName_4=144_3_PORT3, SymbolName_5=144_4_PORT4, SymbolName_6=144_5_PORT5, SymbolName_7=144_6_PORT6, SymbolName_8=144_7_PORT7, SymbolName_9=144_9_PORT9, SymbolName_10=144_15_PORTF, SymbolName_11=144_16_ANA, SymbolName_12=144_17_RTC, SymbolName_13=144_18_CLK, SymbolName_14=144_19_DBUG, SymbolName_15=144_20_I2C, SymbolName_16=144_21_SUP, SymbolName_17=144_22_USB
IC2: library part IF_LPC11U35FHI33/501, Package=HVQFN33, Supplier Part Number 1=2115658, DeviceSetName=IF_LPC11U35FHI33/501, GateName_1=G$1, LibraryName=mbed-HDK-MF-NXP, MF=NXP, MFN=LPC11U35FHI33/501, OC-DIGIKEY=568-9586-ND, OC-MOUSER=771-LPC11U35FHI33501, OC-NEWARK=2115658, Supplier 1=Farnell, SymbolName_1=IF-LPC11U35
J1 J3 J4: "02 MODII HDR SRST B/A .100CL", Package=None, Availability=Unavailable, MP=103185-2, Price=None
J2: "CONN HDR 8/10P 0.1 GOLD PCB 6PC", Insulation Color=Black, Manufacturer="Schmartboard, Inc.", Supplier Part Number 1=1988-1036-ND, ComponentLink1Description=Datasheet, ComponentLink1URL=http://schmartboard.com/content/Brochures/920-0088-01.pdf, ComponentLink2Description="DigiKey Link", ComponentLink2URL=http://digikey.com/product-detail/en/schmartboard-inc/920-0088-01/1988-1036-ND/9559319, Connector Type=Header, Contact Finish - Mating=Gold, Contact Finish - Post=Gold, Contact Length - Post="0.413\" (10.50mm)", Contact Type="Female Socket", Fastening Type=Push-Pull, Insulation Height="0.335\" (8.51mm)", LastUpdated="31.01.2020 20:49:58", Lifecycle Status=Active, Minimum Order=1, Mounting Type="Through Hole", Number of Positions="6, 8, 10", Number of Positions Loaded=All, Number of Rows=1, Packaging=Bulk, Part Number=920-0088-01, Part Status=Active, Pitch - Mating="0.100\" (2.54mm)", Price=5.00, Series=-, Style="Board to Board", Supplier 1=DigiKey, Termination=Solder
J6: library part CMP-1770-00003-1, "Female Header, Pitch 2.54 mm, 2 x 10 Position, Height 8.75 mm, Tail Length 3.2 mm, -40 to 105 degC, RoHS, Bulk", Case\Package=SOIC, Frequency="100 KHz", Max Operating Temperature="70 degC", Max Ouput Current="-200 mA", Max Supply Voltage="16 V", Min Operating Temperature="0 degC", Min Supply Voltage="4.5 V", Package Quantity=2500, ComponentLink1Description=Datasheet, ComponentLink1URL=http://datasheet.octopart.com/PPPC102LFBN-RC-Sullins-datasheet-8327184.pdf, DatasheetVersion="Rev. D, 10/2007", Height="1.58 mm", Length="4.9 mm", Mount="Surface Mount", PackageDescription="Female Header, Pitch 2.54 mm, 2 x 10 Position, Height 8.75 mm, Tail Length 3.2 mm", PackageReference=PPPC102LFBN-RC, Packaging="Tape and Reel", Pins=8, Radiation Hardening=No, REACH SVHC="No SVHC", RoHSCompliant=true, Weight="0.002561 oz", Width="3.91 mm"
LED1: library part CMP-1426-00001-1, "SMD mono-color Chip LED, WL-SMCW, Red", Color=Red, Manufacturer="Wuerth Elektronik", ComponentLink1Description="Manufacturer URL", ComponentLink1URL=http://www.we-online.com, ComponentLink2Description=Datasheet, ComponentLink2URL=http://katalog.we-online.com/led/datasheet/150060RS75000.pdf, PackageReference=0603_A, PartNumber=150060RS75000
P1 P4: library part CMP-1502-01084-1, "THT Vertical Pin Header WR-PHD, Pitch 2.54 mm, Dual Row, 10 pins", Contact Resistance=20mOhm, Manufacturer="Wurth Elektronik", Operating Temperature=-40to105degC, Rated Current=3A, Withstanding Voltage=500VAC, Working Voltage=250VAC, Datasheet URL=https://katalog.we-online.de/em/datasheet/6130xx21121.pdf, Gender=Male, Manufacturer URL=http://www.we-online.de, Mounting Technology=THT, Orientation=Vertical, Package Reference=61301021121, Packaging=Bag, Part Number=61301021121, Pin Number=10, Pitch=2.54mm, Publisher=WurthElektronik, Row Number=Dual
P2 P3: "CONN RCPT 5POS MICRO USB R/A  SMD", Supplier Part Number 1=1568026, Supplier 1=Farnell, Supplier 2=Mouser, Supplier Part Number 2=538-47346-0001
Q1: library part CMP-14409-000006-1, "MOSFET P-CH 50V 130MA SOT-23", Continuous Drain Current=-130mA, Drain To Source Breakdown Voltage=-50V, Drain To Source Resistance=6Ω, Gate To Source Voltage=20V, Input Capacitace At Vds="25pF @ -25V", Manufacturer="Nexperia USA Inc.", Manufacturer Part Number=BSS84,215, Max Junction Temp=+150°C, Package=SOT23, Power Dissipation=250mW, Temperature="-65°C to +150°C", Temperature Range Low=-65°C, Automotive=No, Category=Trans, ComponentLink2Description=Datasheet, ComponentLink2URL=https://assets.nexperia.com/documents/data-sheet/BSS84.pdf, Depletion Mode=False, Device Class L1="Discrete Semiconductors", Device Class L2=Transistors, Device Class L3=MOSFETs, Digikey Description="MOSFET P-CH 50V 130MA SOT-23", Drain To Source Voltage=-50V, Footprint Url=https://assets.nexperia.com/documents/outline-drawing/SOT23.pdf, Height=1.1mm, Ipc Land Pattern Name=SOT95P230X100-3, Lead Free=Yes, Number Of Channels=1, Number Of P Channels=1, Octopart=https://octopart.com/bss84%2C215-nexperia-78739375, RoHS=TRUE, Rthja Max=500K/W, Temperature Range High=+150°C, Threshold Vgs Max=-2V, Threshold Vgs Min=-0.8V, Turn Off Delay Time=7ns, Turn On Delay Time=3ns
R1 R4 R5: library part CR0603-FX-1212ELF, "RES SMD 12.1K OHM 1% 1/10W 0603", Device Package="0603 (1608 Metric)", Manufacturer="Bourns Inc.", Operating Temperature="-55°C ~ 155°C", Power (Watts)="0.1W, 1/10W", Supplier Device Package=0603, Supplier Part Number 1=CR0603-FX-1212ELFCT-ND, Temperature Coefficient=±100ppm/°C, Tolerance=±1%, ComponentLink1Description=Datasheet, ComponentLink1URL=https://www.bourns.com/docs/Product-Datasheets/CHPREZTR.pdf, ComponentLink2Description="DigiKey Link", ComponentLink2URL=http://digikey.com/product-detail/en/bourns-inc/CR0603-FX-1212ELF/CR0603-FX-1212ELFCT-ND/3925302, Composition="Thick Film", Features="Moisture Resistant", Height - Seated (Max)="0.022\" (0.55mm)", LastUpdated="02.09.2020 1:10:21", Lifecycle Status=Active, Minimum Order=1, Number of Terminations=2, Package / Case="0603 (1608 Metric)", Packaging=CutTape, Part Number=CR0603-FX-1212ELF, Part Status=Active, PartId=6585, Price=0.10, Resistance="12.1 kOhms", Series=CR0603, Size / Dimension="0.063\" L x 0.031\" W (1.60mm x 0.80mm)", Supplier 1=DigiKey
R2 R3 R9 R16: library part RNCS0603BKE10K0, "RES 10K OHM 0.1% 1/16W 0603", Device Package="0603 (1608 Metric)", Manufacturer="Stackpole Electronics Inc", Operating Temperature="-55°C ~ 155°C", Power (Watts)="0.063W, 1/16W", Ratings=AEC-Q200, Resistance="10 kOhms", Supplier Device Package=0603, Supplier Part Number 1=RNCS0603BKE10K0CT-ND, Temperature Coefficient=±25ppm/°C, Tolerance=±0.1%, ComponentLink1Description=Datasheet, ComponentLink1URL=https://www.seielect.com/catalog/sei-rncs_rnch.pdf, ComponentLink2Description="DigiKey Link", ComponentLink2URL=http://digikey.com/product-detail/en/stackpole-electronics-inc/RNCS0603BKE10K0/RNCS0603BKE10K0CT-ND/1800113, Composition="Thin Film", Features="Anti-Corrosive, Automotive AEC-Q200, Moisture Resistant", Height - Seated (Max)="0.022\" (0.55mm)", LastUpdated="02.09.2020 1:10:25", Lifecycle Status=Active, Minimum Order=1, Number of Terminations=2, Package / Case="0603 (1608 Metric)", Packaging=TapeAndReel, Part Number=RNCS0603BKE10K0, Part Status=Active, PartId=4838, Price=0.08, Series=RNCS, Size / Dimension="0.061\" L x 0.031\" W (1.55mm x 0.80mm)", Supplier 1=DigiKey
R6: library part CRT0603-BY-10R0ELF, "RES SMD 10 OHM 0.1% 1/10W 0603", Device Package="0603 (1608 Metric)", Manufacturer="Bourns Inc.", Operating Temperature="-55°C ~ 155°C", Power (Watts)="0.1W, 1/10W", Supplier Device Package=0603, Supplier Part Number 1=CRT0603-BY-10R0ELFCT-ND, Temperature Coefficient=±25ppm/°C, Tolerance=±0.1%, ComponentLink1Description=Datasheet, ComponentLink1URL=https://www.bourns.com/docs/Product-Datasheets/crt.pdf, ComponentLink2Description="DigiKey Link", ComponentLink2URL=http://digikey.com/product-detail/en/bourns-inc/CRT0603-BY-10R0ELF/CRT0603-BY-10R0ELFCT-ND/1775043, Composition="Thin Film", Features="Current Sense", Height - Seated (Max)="0.024\" (0.60mm)", LastUpdated="02.09.2020 1:10:25", Lifecycle Status=Active, Minimum Order=1, Number of Terminations=2, Package / Case="0603 (1608 Metric)", Packaging=TapeAndReel, Part Number=CRT0603-BY-10R0ELF, Part Status=Active, PartId=4866, Price=0.05, Resistance="10 Ohms", Series=CRT, Size / Dimension="0.061\" L x 0.031\" W (1.55mm x 0.80mm)", Supplier 1=DigiKey
R7: library part RMCF0603JT100K, "RES 100K OHM 5% 1/10W 0603", Device Package="0603 (1608 Metric)", Manufacturer="Stackpole Electronics Inc", Operating Temperature="-55°C ~ 155°C", Power (Watts)="0.1W, 1/10W", Ratings=AEC-Q200, Resistance="100 kOhms", Supplier Device Package=0603, Supplier Part Number 1=RMCF0603JT100KCT-ND, Temperature Coefficient=±200ppm/°C, Tolerance=±5%, ComponentLink1Description=Datasheet, ComponentLink1URL=https://www.seielect.com/catalog/sei-rmcf_rmcp.pdf, ComponentLink2Description="DigiKey Link", ComponentLink2URL=http://digikey.com/product-detail/en/stackpole-electronics-inc/RMCF0603JT100K/RMCF0603JT100KCT-ND/1943203, Composition="Thick Film", Features="Automotive AEC-Q200", Height - Seated (Max)="0.022\" (0.55mm)", LastUpdated="02.09.2020 1:10:23", Lifecycle Status=Active, Minimum Order=1, Number of Terminations=2, Package / Case="0603 (1608 Metric)", Packaging=CutTape, Part Number=RMCF0603JT100K, Part Status=Active, PartId=5863, Price=0.10, Series=RMCF, Size / Dimension="0.061\" L x 0.031\" W (1.55mm x 0.80mm)", Supplier 1=DigiKey
R8 R22: library part RNCS0603BKE100R, "RES 100 OHM 0.1% 1/16W 0603", Device Package="0603 (1608 Metric)", Manufacturer="Stackpole Electronics Inc", Operating Temperature="-55°C ~ 155°C", Power (Watts)="0.063W, 1/16W", Ratings=AEC-Q200, Supplier Device Package=0603, Supplier Part Number 1=RNCS0603BKE100RCT-ND, Temperature Coefficient=±25ppm/°C, Tolerance=±0.1%, ComponentLink1Description=Datasheet, ComponentLink1URL=https://www.seielect.com/catalog/sei-rncs_rnch.pdf, ComponentLink2Description="DigiKey Link", ComponentLink2URL=http://digikey.com/product-detail/en/stackpole-electronics-inc/RNCS0603BKE100R/RNCS0603BKE100RCT-ND/1800117, Composition="Thin Film", Features="Anti-Corrosive, Automotive AEC-Q200, Moisture Resistant", Height - Seated (Max)="0.022\" (0.55mm)", LastUpdated="02.09.2020 1:10:25", Lifecycle Status=Active, Minimum Order=1, Number of Terminations=2, Package / Case="0603 (1608 Metric)", Packaging=TapeAndReel, Part Number=RNCS0603BKE100R, Part Status=Active, PartId=4839, Price=0.08, Resistance="100 Ohms", Series=RNCS, Size / Dimension="0.061\" L x 0.031\" W (1.55mm x 0.80mm)", Supplier 1=DigiKey
R10 R11 R12 R19 R20 R21: library part CRCW0603470RJNEAHP, "RES SMD 470 OHM 5% 1/4W 0603", Device Package="0603 (1608 Metric)", Manufacturer="Vishay Dale", Operating Temperature="-55°C ~ 155°C", Power (Watts)="0.25W, 1/4W", Ratings=AEC-Q200, Supplier Device Package=0603, Supplier Part Number 1=541-470SACT-ND, Temperature Coefficient=±200ppm/°C, Tolerance=±5%, ComponentLink1Description=Datasheet, ComponentLink1URL=http://www.vishay.com/docs/20043/crcwhpe3.pdf, ComponentLink2Description="DigiKey Link", ComponentLink2URL=http://digikey.com/product-detail/en/vishay-dale/CRCW0603470RJNEAHP/541-470SACT-ND/2222809, Composition="Thick Film", Features="Automotive AEC-Q200, Pulse Withstanding", Height - Seated (Max)="0.022\" (0.55mm)", LastUpdated="02.09.2020 1:09:49", Lifecycle Status=Active, Minimum Order=1, Number of Terminations=2, Package / Case="0603 (1608 Metric)", Packaging=TapeAndReel, Part Number=CRCW0603470RJNEAHP, Part Status=Active, PartId=21320, Price=0.02, Resistance="470 Ohms", Series=CRCW-HP, Size / Dimension="0.063\" L x 0.033\" W (1.60mm x 0.85mm)", Supplier 1=DigiKey
R13 R14: library part CPF0603B33RE, "RES SMD 33 OHM 0.1% 1/16W 0603", Device Package="0603 (1608 Metric)", Manufacturer="TE Connectivity Passive Product", Operating Temperature="-55°C ~ 155°C", Power (Watts)="0.063W, 1/16W", Resistance="33 Ohms", Supplier Device Package=0603, Supplier Part Number 1=A119909CT-ND, Temperature Coefficient=±25ppm/°C, Tolerance=±0.1%, ComponentLink1Description=Datasheet, ComponentLink1URL=https://www.te.com/commerce/DocumentDelivery/DDEController?Action=srchrtrv&DocNm=1773200&DocType=DS&DocLang=English, ComponentLink2Description="DigiKey Link", ComponentLink2URL=http://digikey.com/product-detail/en/te-connectivity-passive-product/CPF0603B33RE/A119909CT-ND/4966507, Composition="Thin Film", Height - Seated (Max)="0.022\" (0.55mm)", LastUpdated="02.09.2020 1:10:25", Lifecycle Status=Active, Minimum Order=1, Number of Terminations=2, Package / Case="0603 (1608 Metric)", Packaging=TapeAndReel, Part Number=CPF0603B33RE, Part Status=Active, PartId=4881, Price=0.09, Series="CPF, Neohm", Size / Dimension="0.061\" L x 0.031\" W (1.55mm x 0.80mm)", Supplier 1=DigiKey
R15: library part CRGP0603F1K5, "CRGP 0603 1K5 1%", Device Package="0603 (1608 Metric)", Manufacturer="TE Connectivity Passive Product", Operating Temperature="-55°C ~ 155°C", Power (Watts)="0.25W, 1/4W", Resistance="1.5 kOhms", Supplier Device Package=0603, Supplier Part Number 1=A130418CT-ND, Temperature Coefficient=±100ppm/°C, Tolerance=±1%, ComponentLink1Description=Datasheet, ComponentLink1URL=https://www.te.com/commerce/DocumentDelivery/DDEController?Action=srchrtrv&DocNm=9-1773463-9&DocType=DS&DocLang=English, ComponentLink2Description="DigiKey Link", ComponentLink2URL=http://digikey.com/product-detail/en/te-connectivity-passive-product/CRGP0603F1K5/A130418CT-ND/8578250, Composition="Thick Film", Features="Pulse Withstanding", Height - Seated (Max)="0.022\" (0.55mm)", LastUpdated="02.09.2020 1:10:24", Lifecycle Status=Active, Minimum Order=1, Number of Terminations=2, Package / Case="0603 (1608 Metric)", Packaging=TapeAndReel, Part Number=CRGP0603F1K5, Part Status=Active, PartId=5000, Price=0.02, Series=CRGP, Size / Dimension="0.063\" L x 0.031\" W (1.60mm x 0.80mm)", Supplier 1=DigiKey
R17 R18: library part CRCW0603470RJNEAHP, "RES SMD 470 OHM 5% 1/4W 0603", Device Package="0603 (1608 Metric)", Manufacturer="Vishay Dale", Operating Temperature="-55°C ~ 155°C", Power (Watts)="0.25W, 1/4W", Ratings=AEC-Q200, Resistance="470 Ohms", Supplier Device Package=0603, Supplier Part Number 1=3495224, Temperature Coefficient=±200ppm/°C, Tolerance=±5%, ComponentLink1Description=Datasheet, ComponentLink1URL=http://www.vishay.com/docs/20043/crcwhpe3.pdf, ComponentLink2Description="DigiKey Link", ComponentLink2URL=http://digikey.com/product-detail/en/vishay-dale/CRCW0603470RJNEAHP/541-470SACT-ND/2222809, Composition="Thick Film", Features="Automotive AEC-Q200, Pulse Withstanding", Height - Seated (Max)="0.022\" (0.55mm)", LastUpdated="02.09.2020 1:09:49", Lifecycle Status=Active, Minimum Order=1, Number of Terminations=2, Package / Case="0603 (1608 Metric)", Packaging=TapeAndReel, Part Number=CRCW0603470RJNEAHP, Part Status=Active, PartId=21320, Price=0.02, Series=CRCW-HP, Size / Dimension="0.063\" L x 0.033\" W (1.60mm x 0.85mm)", Supplier 1=Farnell
R23 R24 R27 R28 R29 R30: library part ERJ-3EKF2201V, "RES SMD 2.2K OHM 1% 1/10W 0603", Device Package="0603 (1608 Metric)", Manufacturer="Panasonic Electronic Components", Operating Temperature="-55°C ~ 155°C", Power (Watts)="0.1W, 1/10W", Ratings=AEC-Q200, Resistance="2.2 kOhms", Supplier Device Package=0603, Supplier Part Number 1=P2.20KHCT-ND, Temperature Coefficient=±100ppm/°C, Tolerance=±1%, ComponentLink1Description=Datasheet, ComponentLink1URL=https://industrial.panasonic.com/cdbs/www-data/pdf/RDA0000/AOA0000C304.pdf, ComponentLink2Description="DigiKey Link", ComponentLink2URL=http://digikey.com/product-detail/en/panasonic-electronic-components/ERJ-3EKF2201V/P2.20KHCT-ND/1746742, Composition="Thick Film", Features="Automotive AEC-Q200", Height - Seated (Max)="0.022\" (0.55mm)", LastUpdated="02.09.2020 1:10:23", Lifecycle Status=Active, Minimum Order=1, Number of Terminations=2, Package / Case="0603 (1608 Metric)", Packaging=TapeAndReel, Part Number=ERJ-3EKF2201V, Part Status=Active, PartId=5643, Price=0.01, Series=ERJ, Size / Dimension="0.063\" L x 0.031\" W (1.60mm x 0.80mm)", Supplier 1=DigiKey
R25 R26: library part RK73B1JTTD222J, "RES 2.2K OHM 5% 1/10W 0603", Device Package="0603 (1608 Metric)", Manufacturer="KOA Speer Electronics, Inc.", Operating Temperature="-55°C ~ 155°C", Power (Watts)="0.1W, 1/10W", Ratings=AEC-Q200, Resistance="2.2 kOhms", Supplier Device Package=0603, Supplier Part Number 1=2019-RK73B1JTTD222JCT-ND, Temperature Coefficient=±200ppm/°C, Tolerance=±5%, ComponentLink1Description=Datasheet, ComponentLink1URL=http://www.koaspeer.com/catimages/Products/RK73B/RK73B.pdf, ComponentLink2Description="DigiKey Link", ComponentLink2URL=http://digikey.com/product-detail/en/koa-speer-electronics-inc/RK73B1JTTD222J/2019-RK73B1JTTD222JCT-ND/9846749, Composition="Thick Film", Features="Automotive AEC-Q200, Moisture Resistant", Height - Seated (Max)="0.022\" (0.55mm)", LastUpdated="02.09.2020 1:10:23", Lifecycle Status=Active, Minimum Order=1, Number of Terminations=2, Package / Case="0603 (1608 Metric)", Packaging=CutTape, Part Number=RK73B1JTTD222J, Part Status=Active, PartId=5855, Price=0.10, Series=RK73B, Size / Dimension="0.063\" L x 0.031\" W (1.60mm x 0.80mm)", Supplier 1=DigiKey
R31: library part TLRZ1JTTD, "RES 0 OHM JUMPER 0603", Device Package="0603 (1608 Metric)", Manufacturer="KOA Speer Electronics, Inc.", Operating Temperature="-55°C ~ 170°C", Ratings=AEC-Q200, Supplier Device Package=0603, Supplier Part Number 1=2019-TLRZ1JTTDCT-ND, Tolerance=Jumper, ComponentLink1Description=Datasheet, ComponentLink1URL=http://www.koaspeer.com/catimages/Products/TLRZ/TLRZ.pdf, ComponentLink2Description="DigiKey Link", ComponentLink2URL=http://digikey.com/product-detail/en/koa-speer-electronics-inc/TLRZ1JTTD/2019-TLRZ1JTTDCT-ND/9847537, Composition="Metal Element", Features="Automotive AEC-Q200, Current Sense", Height - Seated (Max)="0.022\" (0.55mm)", LastUpdated="02.09.2020 1:10:25", Lifecycle Status=Active, Minimum Order=1, Number of Terminations=2, Package / Case="0603 (1608 Metric)", Packaging=TapeAndReel, Part Number=TLRZ1JTTD, Part Status=Active, PartId=4851, Price=0.08, Series=TLRZ, Size / Dimension="0.063\" L x 0.031\" W (1.60mm x 0.80mm)", Supplier 1=DigiKey
SW1: library part CMP-2000-07486-1, "Micro Miniature Push Button Switch FSM JSM, 50 mA, -35 to 85 degC, 4-Pin SMD, RoHS, Tape and Reel", Capacitance=0f, Case\/Package=SMD/SMT, Contact Current Rating=50mA, Contact Resistance=100mOhm, Manufacturer="TE Connectivity", Max Operating Temperature=85degC, Max Voltage Rating (DC)=12V, Min Operating Temperature=-35degC, Operating Force=160gf, Package Description="4-Pin Surface Mount Device, Body 6 x 6 mm, Pitch 4.5 mm", Package Quantity=1200, Package Reference=FSM4JSMATR, Voltage Rating (DC)=24V, Actuator Length=0.055inch, Actuator Material=Polyamide, Contact Material=CopperAlloy, Contact Plating=Silver, Current Rating=50mA, Datasheet URL=http://www.te.com/commerce/DocumentDelivery/DDEController?Action=showdoc&DocId=Customer+Drawing%7F2-1437565-7%7FV%7Fpdf%7FEnglish%7FENG_CD_2-1437565-7_V.pdf%7F4-1437565-2, Datasheet Version="Rev. V, 02/2015", Electrical Life=100000Cycles, Illumination Type=Illuminated, Manufacturer URL=http://www.te.com/, Mechanical Life=100000Cycles, Mount=SurfaceMount, Mounting Technology=SurfaceMount, Orientation=Straight, Packaging=TapeandReel, REACH SVHC=Unknown, RoHSCompliant=true, Switch Travel=0.25mm, Termination=GullWing, Throw Configuration=SPST
SW2 SW3 SW4 SW5: library part CMP-2000-07486-1, "Micro Miniature Push Button Switch FSM JSM, 50 mA, -35 to 85 degC, 4-Pin SMD, RoHS, Tape and Reel", Capacitance=0f, Case\/Package=SMD/SMT, Contact Current Rating=50mA, Contact Resistance=100mOhm, Manufacturer="TE Connectivity", Max Operating Temperature=85degC, Max Voltage Rating (DC)=12V, Min Operating Temperature=-35degC, Operating Force=160gf, Package Description="4-Pin Surface Mount Device, Body 6 x 6 mm, Pitch 4.5 mm", Package Quantity=1200, Voltage Rating (DC)=24V, Actuator Length=0.055inch, Actuator Material=Polyamide, Contact Material=CopperAlloy, Contact Plating=Silver, Current Rating=50mA, Datasheet URL=http://www.te.com/commerce/DocumentDelivery/DDEController?Action=showdoc&DocId=Customer+Drawing%7F2-1437565-7%7FV%7Fpdf%7FEnglish%7FENG_CD_2-1437565-7_V.pdf%7F4-1437565-2, Datasheet Version="Rev. V, 02/2015", Electrical Life=100000Cycles, Illumination Type=Illuminated, Manufacturer URL=http://www.te.com/, Mechanical Life=100000Cycles, Mount=SurfaceMount, Mounting Technology=SurfaceMount, Orientation=Straight, Package Reference=FSM4JSMATR, Packaging=TapeandReel, REACH SVHC=Unknown, RoHSCompliant=true, Switch Travel=0.25mm, Termination=GullWing, Throw Configuration=SPST
U1: library part CMP-0136-00743-1, "150 mA, Tiny CMOS LDO with Shutdown, 5-Pin SOT-23, Extended Temperature, Tape and Reel", Code_IPC=SOT23-5, DatasheetVersion="revD, 2005", PackageDescription="5-Lead Plastic Small Outline Transistor (CT) [SOT-23]", PackageReference=SOT-23-CT5, PackageVersion="revBB, Aug-2009"
U2: library part CMP-0395-00062-2, "Single Output Fast Transient Response LDO, 750 mA, Fixed 3.3 V Output, 2.7 to 10 V Input, 8-pin SOIC (D), -40 to 125 degC, Green (RoHS & no Sb/Br)", Manufacturer="Texas Instruments", Accuracy(%)=2, Code_JEDEC=MS-012, ComponentLink1Description="Manufacturer URL", ComponentLink1URL=http://www.ti.com/, ComponentLink2Description=Datasheet, ComponentLink2URL=http://www.ti.com/general/docs/lit/getliterature.tsp?genericPartNumber=TPS77733&fileType=pdf, ComponentLink3Description="Package Specification", ComponentLink3URL=http://www.ti.com/litv/pdf/msoi002j, DatasheetVersion=SLVS230G, Eco-Plan="Green (RoHS & no Sb/Br)", Fixed Output Options(V)=3.3, Iout(Max)(A)=0.75, Iq(Typ)(mA)=0.08, Mounting Technology="Surface Mount", PackageDescription="8-Pin Plastic Small Outline, Body 4.9 x 3.9 mm, Pitch 1.27 mm", PackageReference=D0008A, PackageVersion=4040047-3/M, PartNumber=TPS77733DR, SubFamily="Single Channel LDO", Vdo(Typ)(mV)=260, Vin(Max)(V)=10, Vin(Min)(V)=2.7, Vout Adj(Max)(V)=3.3, Vout Adj(Min)(V)=3.3
U3: library part CMP-1329-00018-1, "MirrorBit Flash Non-Volatile Memory CMOS 3.0 Volt Core with Versatile I/O, Serial Peripheral Interface with Multi-I/O, 128 Mbit, 133 MHz, -40 to 85 degC, 16-Pin SO (SO3016), RoHS, Tube", Manufacturer=Spansion, Temperature Range="-40 to 85 degC", ComponentLink1Description="Manufacturer URL", ComponentLink1URL=http://www.spansion.com/Pages/Default.aspx, ComponentLink2Description=Datasheet, ComponentLink2URL=http://www.spansion.com/Support/Datasheets/S25FL128S_256S_00.pdf, ComponentLink3Description="Package Specification", ComponentLink3URL=http://www.spansion.com/Support/Datasheets/S25FL128S_256S_00.pdf, DatasheetVersion="Rev. 08", Density="128 Mbit", Mounting Technology="Surface Mount", OTP="1024 B", PackageDescription="16-Pin Wide Plastic Small Outline Package, Body 10.3 x 7.5 mm, Pitch 1.27 mm", Packing=Tube, PartNumber=S25FL128SAGMFI011, RoHS=TRUE, Speed="133 MHz", VCC="2.7 to 3.6 V"